# Altium PCB PCB1.pcbdoc
Units mil, origin at the board's own origin, x right, y up, seen from the top; angles counter-clockwise.
Board outline 2833.4 x 859.2 mil, 2 copper layers (Top Layer, Bottom Layer), stack 62.2 mil thick; 27 components, 0 nets, 54 pads, 0 vias.
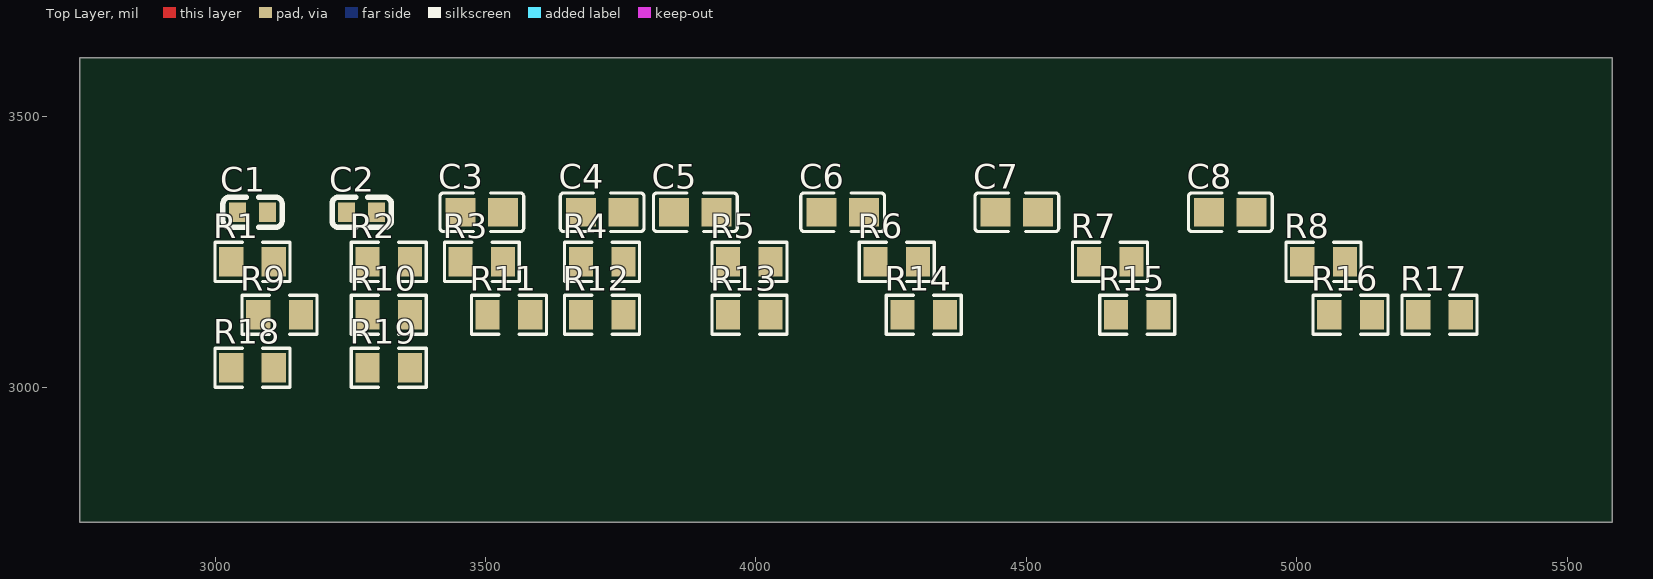
[diagram p0: Top Layer view]
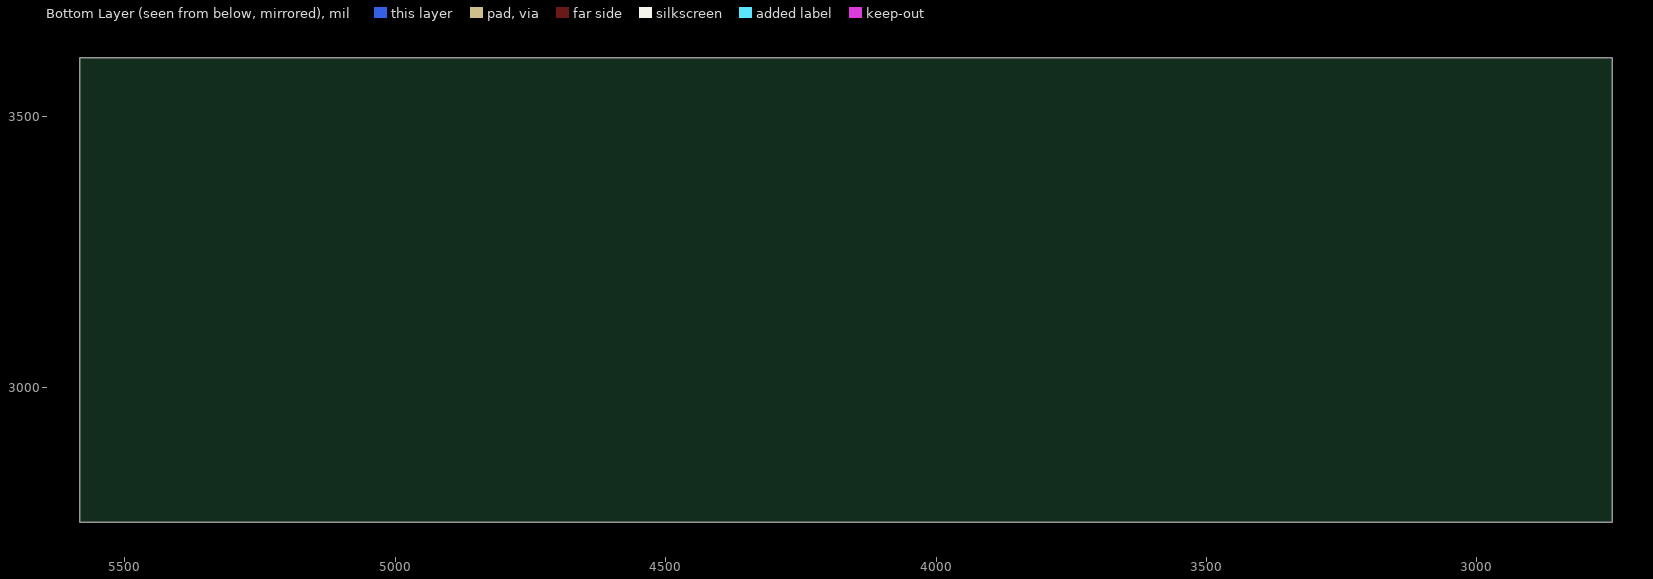
[diagram p1: Bottom Layer view, seen from below]

## Layer stack, top to bottom
Top Solder Mask Layer: solder mask 0.4, Dk 3.3
Top Layer: signal copper 1.4
Dielectric1: surface 59.4, FR4, Dk 4.5
Bottom Layer: signal copper 1.4
Bottom Solder Mask Layer: solder mask 0.4, Dk 3.3

## Board outline
5583.4,2750 2750,2750 2750,3609.2 5583.4,3609.2

## Design rules (kind name [scope] priority, off if disabled: settings)
BoardOutlineClearance copperThickness1oz [All] p0: genericclearance=10 ignorepadtopadclearanceinfootprint=FALSE except(0: Arc-SplitContinuation Track-SplitContinuation SMDPad-SplitContinuation THPad-SplitContinuation Via-SplitContinuation Fill-SplitContinuation Poly-SplitContinuation Region-SplitContinuation Text-SplitContinuation)
BoardOutlineClearance copperThickness2oz [All] p0: genericclearance=10 ignorepadtopadclearanceinfootprint=FALSE except(0: Arc-SplitContinuation Track-SplitContinuation SMDPad-SplitContinuation THPad-SplitContinuation Via-SplitContinuation Fill-SplitContinuation Poly-SplitContinuation Region-SplitContinuation Text-SplitContinuation)
BoardOutlineClearance otherClearance [All] p0: genericclearance=10 ignorepadtopadclearanceinfootprint=FALSE except(0: Arc-SplitContinuation Track-SplitContinuation SMDPad-SplitContinuation THPad-SplitContinuation Via-SplitContinuation Fill-SplitContinuation Poly-SplitContinuation Region-SplitContinuation Text-SplitContinuation)
Clearance copperThickness1oz [All] p1: gap=7 ignorepadtopadclearanceinfootprint=FALSE
Clearance copperThickness2oz [All] p1: gap=7 ignorepadtopadclearanceinfootprint=FALSE
Clearance otherClearance [All] p1: gap=7 ignorepadtopadclearanceinfootprint=FALSE
DiffPairsRouting differentialPair [All] p1: maxuncoupledlength=10 minlimit=6 maxlimit=Infinity mostfreqgap=6 toplayer_minwidth=5 toplayer_prefwidth=10 toplayer_maxwidth=100 bottomlayer_minwidth=5 bottomlayer_prefwidth=10 bottomlayer_maxwidth=100
PasteMaskExpansion pasteMaskExpansion [All] p1: expansion=0
PlaneConnect innerPlane [All] p1: planeconnectstyle=Relief reliefexpansion=20 reliefentries=4 reliefconductorwidth=10 reliefairgap=10
PolygonConnect copperRegion [All] p1: connectstyle=Relief reliefentries=4 reliefconductorwidth=10 polygonreliefangle="90 Angle" airgapwidth=10
RoutingVias viaSize [All] p1: viastyle="Through Hole" holewidth=12.0078 minholewidth=11.811 maxholewidth=248.0314 width=12.0078 minwidth=11.811 maxwidth=248.0314
SolderMaskExpansion solderMaskExpansion [IsVia] p1: useseparateexpansions=TRUE expansion=-1000 expansionbottom=-1000
SolderMaskExpansion solderMaskExpansion [All] p2: useseparateexpansions=TRUE expansion=2 expansionbottom=2
Width copperThickness1oz [All] p1: maxlimit=100 minlimit=5 preferedwidth=10
Width copperThickness2oz [All] p1: maxlimit=100 minlimit=8 preferedwidth=10

## Components (designator, comment, footprint, x,y, rotation, side; value= is the part's Value field where it differs from the comment)
C1 "7pF" C0603#1 3069.3,3323.6 r0 top
C2 "7pF" C0603#2 3271.1,3323.6 r0 top
C3 "10pF" C0805#1 3493.4,3323.6 r0 top
C4 "22pF" C0805#2 3715.7,3323.6 r0 top
C5 "6pF" C0805#3 3888.1,3323.6 r0 top
C6 "16pF" C0805#1 4160.4,3323.6 r0 top
C7 "100nF" C0805#1 4482.7,3323.6 r0 top
C8 "22uF" C0805#3 4877.4,3323.6 r0 top
R1 "1MΩ" R0805#1 3069.3,3231.9 r0 top
R2 "100Ω" R0805#2 3321.1,3231.9 r0 top
R3 "910kΩ" R0805#3 3493.4,3231.9 r0 top
R4 "100kΩ" R0805#1 3715.7,3231.9 r0 top
R5 "1kΩ" R0805#2 3988.1,3231.9 r0 top
R6 "1.5kΩ" R0805#3 4260.4,3231.9 r0 top
R7 "3.57kΩ" R0805#1 4655,3231.9 r0 top
R8 "6.98kΩ" R0805#3 5049.7,3231.9 r0 top
R9 "10.1kΩ" R0805#1 3119.3,3134 r0 top
R10 "18.7kΩ" R0805#2 3321.1,3134 r0 top
R11 "7.68kΩ" R0805#3 3543.4,3134 r0 top
R12 "34kΩ" R0805#1 3715.7,3134 r0 top
R13 "3.01kΩ" R0805#2 3988.1,3134 r0 top
R14 "10kΩ" R0805#3 4310.4,3134 r0 top
R15 "5.76kΩ" R0805#1 4705,3134 r0 top
R16 "20kΩ" R0805#3 5099.7,3134 r0 top
R17 "5kΩ" R0805#2 5264.1,3134 r0 top
R18 "0Ω" R0805#1 3069.3,3036.1 r0 top
R19 "10Ω" R0805#2 3321.1,3036.1 r0 top

## Footprints (in the part's own frame and the unit in brackets; to place one, negate y for a bottom-side part, rotate by r counter-clockwise, add the part's x,y. Pads: shape width x height; smd on the part's side, far side on the other; paste and mask are expansions set on the pad)
C0603#1 [mil]
  rect 31.5x35.4 smd: 1(-27.5,0) 2(27.6,0)
  silkscreen extent -55,-28 55,28
C0603#2 [mil]
  rect 31.5x35.4 smd: 1(-27.6,0) 2(27.5,0)
  silkscreen extent -55,-28 55,28
C0805#1 [mil]
  rect 55.5x53.1 smd paste-3937 mask+2: 1(-39.4,0) 2(39.4,0)
  silkscreen extent -77,-36 77,36
C0805#2 [mil]
  rect 55.5x53.1 smd paste-3937 mask+2: 1(-39.3,0) 2(39.4,0)
  silkscreen extent -77,-36 77,36
C0805#3 [mil]
  rect 55.5x53.1 smd paste-3937 mask+2: 1(-39.4,0) 2(39.3,0)
  silkscreen extent -77,-36 77,36
R0805#1 [mil]
  rect 44.6x54.2 smd paste-3937 mask+2: 1(-39.3,0) 2(39.4,0)
  silkscreen extent -69,-36 69,36
R0805#2 [mil]
  rect 44.6x54.2 smd paste-3937 mask+2: 1(-39.4,0) 2(39.3,0)
  silkscreen extent -69,-36 69,36
R0805#3 [mil]
  rect 44.6x54.2 smd paste-3937 mask+2: 1(-39.4,0) 2(39.4,0)
  silkscreen extent -69,-36 69,36

## Nets (pads, with @x,y where several pads share a name; then routed paths per layer and width w, separated by ;. In a path a pad name is that pad's centre, name@x,y a point inside that pad or via, vN(x,y) a via of type N, cw(c..) or ccw(c..) an arc to the next point about the centre after c; other vN are vias at no path point)
pads on no net: C1.1 C1.2 C2.1 C2.2 C3.1 C3.2 C4.1 C4.2 C5.1 C5.2 C6.1 C6.2 C7.1 C7.2 C8.1 C8.2 R1.1 R1.2 R2.1 R2.2 R3.1 R3.2 R4.1 R4.2 R5.1 R5.2 R6.1 R6.2 R7.1 R7.2 R8.1 R8.2 R9.1 R9.2 R10.1 R10.2 R11.1 R11.2 R12.1 R12.2 R13.1 R13.2 R14.1 R14.2 R15.1 R15.2 R16.1 R16.2 R17.1 R17.2 R18.1 R18.2 R19.1 R19.2